# EAGLE board HapticControl (EAGLE 9.3.2)
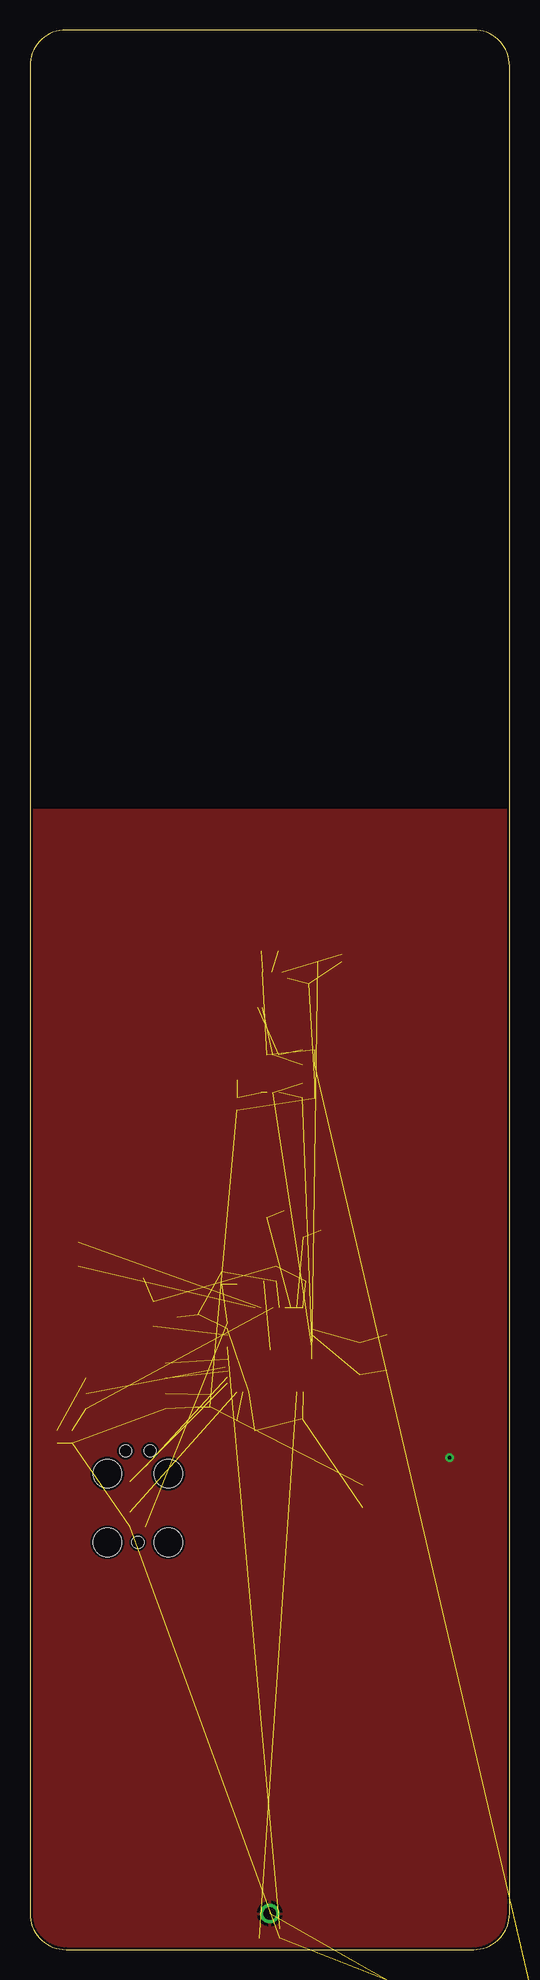
[diagram p0: board, top side]
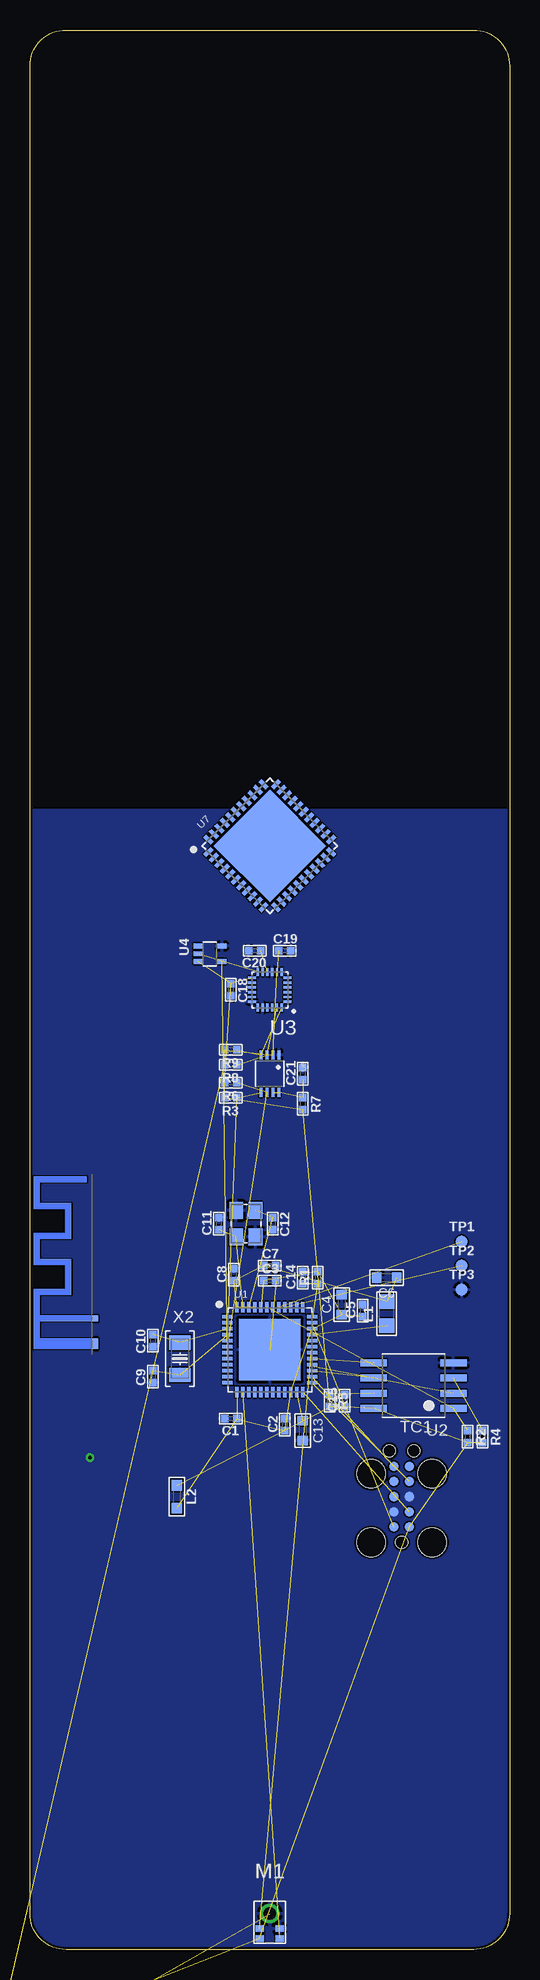
[diagram p1: board, bottom side, seen from below]

Size 40 x 160 mm. Coordinates in mm from the lower left corner, seen from the top.
Outline: 0,157 0,3 arc90 3,0 37,0 arc90 40,3 40,157 arc90 37,160 3,160 arc90 0,157
Copper layers (1*16): Top 0.035mm / dielectric 1.6mm / Bottom 0.035mm
Design rules "jlcpcb-dr": minimum track width 5mil, minimum drill 0.3mm, track to track 5mil, track to pad 5mil, pad to pad 5mil, via to via 5mil, smd to smd 5mil, copper to edge 0.2mm, drill to drill 5mil, minimum pad ring 10mil, minimum via ring 8mil, stop-mask expansion 4mil, vias tented up to drill 0.7mm, thermal gap 10mil

## Footprints (pad centres in the part's own frame; a part is rotated, then mirrored left to right if it is on the bottom)
_0402 = smd 0.6 x 0.6: 1 -0.508,0; 2 0.508,0
0603_WAVE = smd 0.8 x 0.9: P$1 -0.823,0; P$2 0.823,0
TRACE_ANTENNA_2.4GHZ_15.2MM = smd 0.5 x 0.5: ANT 0,-0.25 | smd 0.9 x 0.5: GND -2.1,-0.25
_0805 = smd 1.2 x 1.3: 1 -1.016,0; 2 1.016,0
_0603 = smd 0.9 x 0.9: 1 -0.95,0; 2 0.95,0
SPH0641LM4H-1 = smd 0.725 x 0.522: 1 -0.838,2.074; 2 -0.838,1.252; 4 0.838,1.252; 5 0.838,2.074 | drill 1.025 pad 1.625: 3 0,0
TC2050-IDC = smd 0.787 x 0.787: 1 -2.54,-0.635; 2 -1.27,-0.635; 3 0,-0.635; 4 1.27,-0.635; 5 2.54,-0.635; 6 2.54,0.635; 7 1.27,0.635; 8 0,0.635; 9 -1.27,0.635; 10 -2.54,0.635 | hole 0.991: -3.81,0; 3.81,1.016; 3.81,-1.016 | hole 2.375: -3.81,2.54; -3.81,-2.54; 1.905,2.54; 1.905,-2.54
TEST_POINT = smd 1 x 1: 1 0,0
QFN48 = smd 0.86 x 0.26: 1 -3.53,2.75; 2 -3.53,2.25; 3 -3.53,1.75; 4 -3.53,1.25; 5 -3.53,0.75; 6 -3.53,0.25; 7 -3.53,-0.25; 8 -3.53,-0.75; 9 -3.53,-1.25; 10 -3.53,-1.75; 11 -3.53,-2.25; 12 -3.53,-2.75; 25 3.53,-2.75; 26 3.53,-2.25; 27 3.53,-1.75; 28 3.53,-1.25; 29 3.53,-0.75; 30 3.53,-0.25; 31 3.53,0.25; 32 3.53,0.75; 33 3.53,1.25; 34 3.53,1.75; 35 3.53,2.25; 36 3.53,2.75 | smd 0.26 x 0.86: 13 -2.75,-3.53; 14 -2.25,-3.53; 15 -1.75,-3.53; 16 -1.25,-3.53; 17 -0.75,-3.53; 18 -0.25,-3.53; 19 0.25,-3.53; 20 0.75,-3.53; 21 1.25,-3.53; 22 1.75,-3.53; 23 2.25,-3.53; 24 2.75,-3.53; 37 2.75,3.53; 38 2.25,3.53; 39 1.75,3.53; 40 1.25,3.53; 41 0.75,3.53; 42 0.25,3.53; 43 -0.25,3.53; 44 -0.75,3.53; 45 -1.25,3.53; 46 -1.75,3.53; 47 -2.25,3.53; 48 -2.75,3.53 | smd 5.15 x 5.15: 49 0,0
WSOIC8 = smd 0.6 x 2.2: 1 -1.905,-3.33; 2 -0.635,-3.33; 3 0.635,-3.33; 4 1.905,-3.33; 5 1.905,3.33; 6 0.635,3.33; 7 -0.635,3.33; 8 -1.905,3.33
QFN20 = smd 0.64 x 0.2: 1 -1.48,1; 2 -1.48,0.6; 3 -1.48,0.2; 4 -1.48,-0.2; 5 -1.48,-0.6; 6 -1.48,-1; 13 1.48,-1; 14 1.48,-0.6; 15 1.48,-0.2; 16 1.48,0.2; 17 1.48,0.6; 18 1.48,1 | smd 0.2 x 0.64: 7 -1,-1.48; 8 -0.6,-1.48; 9 -0.2,-1.48; 10 0.2,-1.48; 11 0.6,-1.48; 12 1,-1.48; 19 1,1.48; 20 0.6,1.48; 21 0.2,1.48; 22 -0.2,1.48; 23 -0.6,1.48; 24 -1,1.48
SC70-5 = smd 0.4 x 0.75: 1 -0.65,-1; 2 0,-1; 3 0.65,-1; 4 0.65,1; 5 -0.65,1
SOT-23 = smd 0.6 x 1: 1 -0.95,-1.2; 2 0.95,-1.2; 3 0,1.2
VSSOP8 = smd 0.75 x 0.25: 1 -1.55,0.75; 2 -1.55,0.25; 3 -1.55,-0.25; 4 -1.55,-0.75; 5 1.55,-0.75; 6 1.55,-0.25; 7 1.55,0.25; 8 1.55,0.75
QFN44 = smd 0.85 x 0.35: 1 -4,3.25; 2 -4,2.6; 3 -4,1.95; 4 -4,1.3; 5 -4,0.65; 6 -4,0; 7 -4,-0.65; 8 -4,-1.3; 9 -4,-1.95; 10 -4,-2.6; 11 -4,-3.25; 23 4,-3.25; 24 4,-2.6; 25 4,-1.95; 26 4,-1.3; 27 4,-0.65; 28 4,0; 29 4,0.65; 30 4,1.3; 31 4,1.95; 32 4,2.6; 33 4,3.25 | smd 0.35 x 0.85: 12 -3.25,-4; 13 -2.6,-4; 14 -1.95,-4; 15 -1.3,-4; 16 -0.65,-4; 17 0,-4; 18 0.65,-4; 19 1.3,-4; 20 1.95,-4; 21 2.6,-4; 22 3.25,-4; 34 3.25,4; 35 2.6,4; 36 1.95,4; 37 1.3,4; 38 0.65,4; 39 0,4; 40 -0.65,4; 41 -1.3,4; 42 -1.95,4; 43 -2.6,4; 44 -3.25,4 | smd 6.6 x 6.6: 45 0,0
4-SMD-3225 = smd 1.4 x 1.15: 1 -1.1,0.8; 2 1.1,0.8; 3 1.1,-0.8; 4 -1.1,-0.8
2-SMD-3215 = smd 1.2 x 1.8: 1 -1.35,0; 2 1.35,0

## Placement (x,y rotation side)
C1  100n  [_0402]  23.25,44.25 180 bottom
C2  100n  [_0402]  18.75,43.75 90 bottom
C3  100n  [_0402]  20,55.75 0 bottom
C4  [0603_WAVE]  14,53.75 90 bottom
C5  100n  [_0402]  12.25,53.25 90 bottom
C6  10u  [0603_WAVE]  10.25,56 180 bottom
C7  100n  [_0402]  20,57 0 bottom
C8  100n  [_0402]  23,56.25 90 bottom
C9  3p  [_0402]  29.75,47.75 270 bottom
C10  3p  [_0402]  29.75,50.75 270 bottom
C11  [_0402]  24.25,60.5 90 bottom
C12  [_0402]  19.75,60.5 270 bottom
C13  1u  [0603_WAVE]  17.25,43.25 270 bottom
C14  100n  [_0402]  17.25,56 90 bottom
C15  100n  [_0402]  13.75,45.75 90 bottom
C16  1u  [0603_WAVE]  39,-7 270 top  (outside the outline)
C17  1u  [0603_WAVE]  45,-7 90 top  (outside the outline)
C18  100n  [_0402]  23.25,80 270 bottom
C19  100n  [_0402]  18.75,83.25 0 bottom
C20  100n  [_0402]  21.25,83.25 180 bottom
C21  100n  [_0402]  17.25,73 90 bottom
E1  2.4GHZTRACE-15.2MM  [TRACE_ANTENNA_2.4GHZ_15.2MM]  34.8,52.6 90 bottom
L1  10u  [_0805]  10.25,53 90 bottom
L2  filter  [_0603]  27.75,37.75 270 bottom
M1  SPH0641LM4H-1  [SPH0641LM4H-1]  20,3 180 bottom
R1  100k  [_0402]  16,56 90 bottom
R2  100k  [_0402]  3.5,42.75 270 bottom
R3  4k7  [_0402]  23.25,71 180 bottom
R4  100k  [_0402]  2.25,42.75 270 bottom
R5  100k  [_0402]  15,45.75 270 bottom
R6  4k7  [_0402]  23.25,72.25 180 bottom
R7  200k  [_0402]  17.25,70.5 270 bottom
R8  200k  [_0402]  23.25,73.75 180 bottom
R9  200k  [_0402]  23.25,75 180 bottom
TC1  TC2050-IDC  [TC2050-IDC]  9,37.75 90 bottom
TP1  TEST_POINT  [TEST_POINT]  4,59 0 bottom
TP2  TEST_POINT  [TEST_POINT]  4,57 0 bottom
TP3  TEST_POINT  [TEST_POINT]  4,55 0 bottom
U1  CC2642R  [QFN48]  20,50 0 bottom
U2  SST26VF064B  [WSOIC8]  8,47 90 bottom
U3  ICM20948  [QFN20]  20,80 180 bottom
U4  74LVC1G17  [SC70-5]  25,83 270 bottom
U5  MCP1700T-1802TT  [SOT-23]  42,-7 0 top  (outside the outline)
U6  PCA9306-DCU  [VSSOP8]  20,73 270 bottom
U7  MTCH6301  [QFN44]  20,92 45 bottom
X1  48MHz  [4-SMD-3225]  22,60.5 90 bottom
X2  32.768kHz  [2-SMD-3215]  27.5,49.25 90 bottom

## Library data of the parts
C1-C21 = Passive Components > Capacitors > Multilayer Ceramic Capacitors MLCC
E1 = Microstrip Antenna
L1 L2 = Passive Components > Inductors, Chokes & Coils
M1 = Knowles
R1-R9 = Passive Components > Resistors > Chip Resistors
TC1 = TagConnect
TP1-TP3 = Utility > Board
U1 U6 = Texas Instruments
U2 U7 = Microchip
U3 = TDK
U4 = Semiconductors > Integrated Circuits - ICs > Logic ICs > Logic Gates
U5 = Power > LDO Voltage Regulators
X1 X2 = Crystal

## Nets
1.8V: C17.P$1 C19.1 R8.2 R9.2 U3.8 U5.2 U6.2
3.3V: C15.1 C16.P$1 C18.1 L2.1 M1.5 R2.2 R3.2 R4.2 R5.2 R6.2 R7.2 TC1.1 U2.8 U3.13 U4.3 U5.3
DBG_RX: TP2.1 U1.40
DBG_TX: TP1.1 U1.41
FLASH_CS: R2.1 U1.43 U2.1
FLASH_MISO: U1.28 U2.2
FLASH_MOSI: U1.29 U2.5
GND: C1.2 C2.2 C3.2 C4.P$2 C5.2 C6.P$2 C7.2 C8.2 C9.2 C10.2 C11.2 C12.2 C13.P$2 C14.2 C15.2 C16.P$2 C17.P$2 C18.2 C19.2 C20.2 C21.2 M1.2 M1.3 TC1.3 TC1.9 TP3.1 U1.49 U2.4 U3.9 U3.18 U3.20 U4.5 U5.1 U6.1 X1.2 X1.4
I2S_CLK: M1.4 U1.31
I2S_DATIN: M1.1 U1.14
JTAG_TCKC: TC1.4 U1.25
JTAG_TDI: TC1.8
JTAG_TDI/FLASH_MOSI: U1.27 U2.6
JTAG_TDO: TC1.6 U1.26
JTAG_TMSC: TC1.2 U1.24
MCU_!RESET: C14.1 R1.1 TC1.10 U1.35
MCU_SW: L1.1 U1.33
MPU_INT: U1.8 U4.4
N$1: U1.2
N$2: C13.P$1 U1.23
N$3: U1.1
N$4: U3.12 U4.2
N$5: R8.1 U3.23 U6.3
N$6: R9.1 U3.24 U6.4
N$7: R4.1 U2.3
N$8: R5.1 U2.7
N$9: C20.1 U3.10
N$11: C21.1 R7.1 U6.7 U6.8
SCL: R6.1 U1.6 U6.6
SDA: R3.1 U1.5 U6.5
VDDR: C6.P$1 C7.1 C8.1 L1.2 U1.45 U1.48
VDDS: C1.1 C2.1 C3.1 C4.P$1 C5.1 L2.2 R1.2 U1.13 U1.22 U1.34 U1.44
XTAL_32K_Q1: C10.1 U1.3 X2.2
XTAL_32K_Q2: C9.1 U1.4 X2.1
XTAL_48M_N: C12.1 U1.46 X1.3
XTAL_48M_P: C11.1 U1.47 X1.1

## Tracks (layer width: path | path; a pad name or v marks a point on that pad's centre or on a via)
1.8V  (6 unrouted)
3.3V  (15 unrouted)
DBG_RX  (1 unrouted)
DBG_TX  (1 unrouted)
FLASH_CS  (2 unrouted)
FLASH_MISO  (1 unrouted)
  Bottom 0.127: 16.29,48.57 U1.28
FLASH_MOSI  (1 unrouted)
GND  (via drill 0.3)  (4 unrouted)
  other vias: 35,41
  pour Bottom: 41,95 -1,95 -1,-1 41,-1
  pour Top (isolate 0.2): 42,95 -2,95 -2,-2 42,-2
I2S_CLK  (1 unrouted)
I2S_DATIN  (1 unrouted)
JTAG_TCKC  (1 unrouted)
JTAG_TDI/FLASH_MOSI  (1 unrouted)
JTAG_TDO  (1 unrouted)
JTAG_TMSC  (1 unrouted)
MCU_!RESET  (3 unrouted)
MCU_SW  (1 unrouted)
MPU_INT  (1 unrouted)
N$2  (1 unrouted)
N$4  (1 unrouted)
N$5  (2 unrouted)
N$6  (2 unrouted)
N$7  (1 unrouted)
N$8  (1 unrouted)
N$9  (1 unrouted)
N$11  (3 unrouted)
SCL  (2 unrouted)
SDA  (2 unrouted)
VDDR  (5 unrouted)
VDDS  (10 unrouted)
XTAL_32K_Q1  (2 unrouted)
XTAL_32K_Q2  (2 unrouted)
XTAL_48M_N  (2 unrouted)
XTAL_48M_P  (2 unrouted)

## Text on the board
Reference: LRA | LRA | Mic